# Altium PCB 30-277 - DriveHUB - CV Card DCDC Module.PcbDoc
Units mil, origin at the board's own origin, x right, y up, seen from the top; angles counter-clockwise.
Board outline 2362.2 x 1574.8 mil, 4 copper layers (Top Layer, Signal Layer 1, Signal Layer 2, Bottom Layer), stack 64.331 mil thick; 35 components, 23 nets, 143 pads, 513 vias.
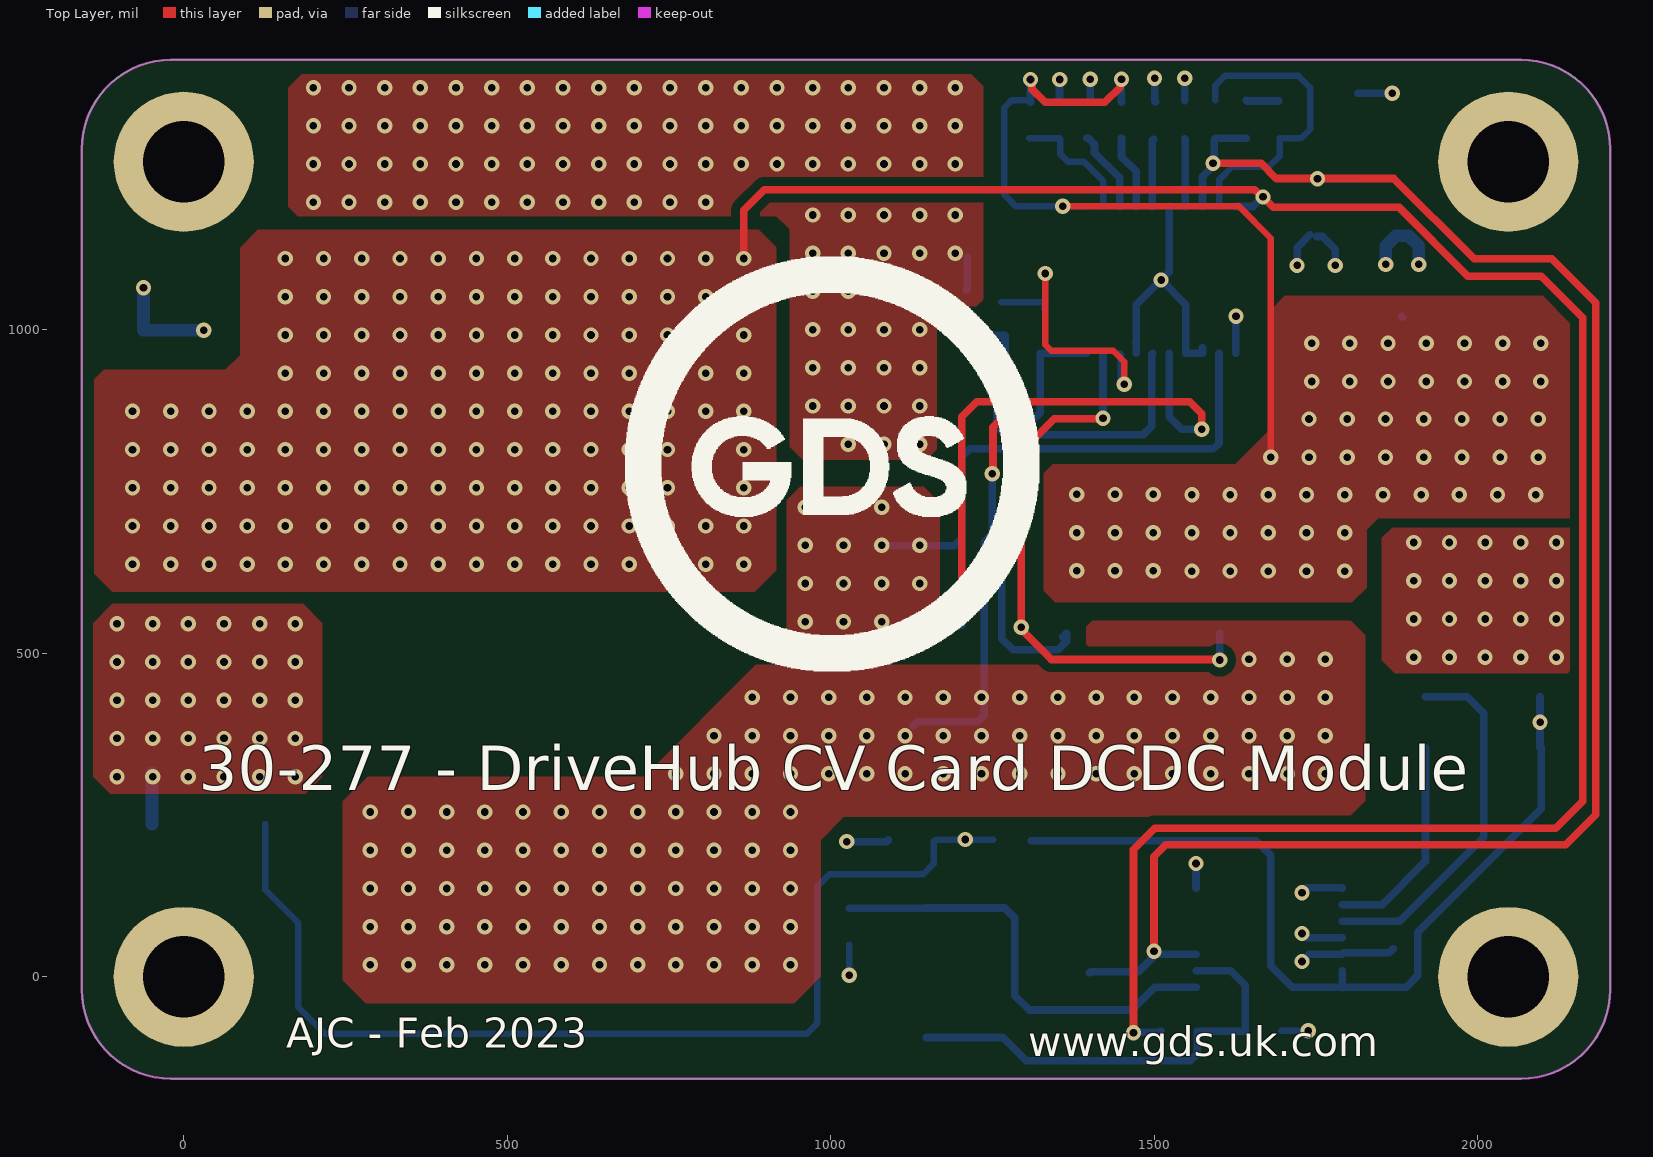
[diagram p0: Top Layer view]
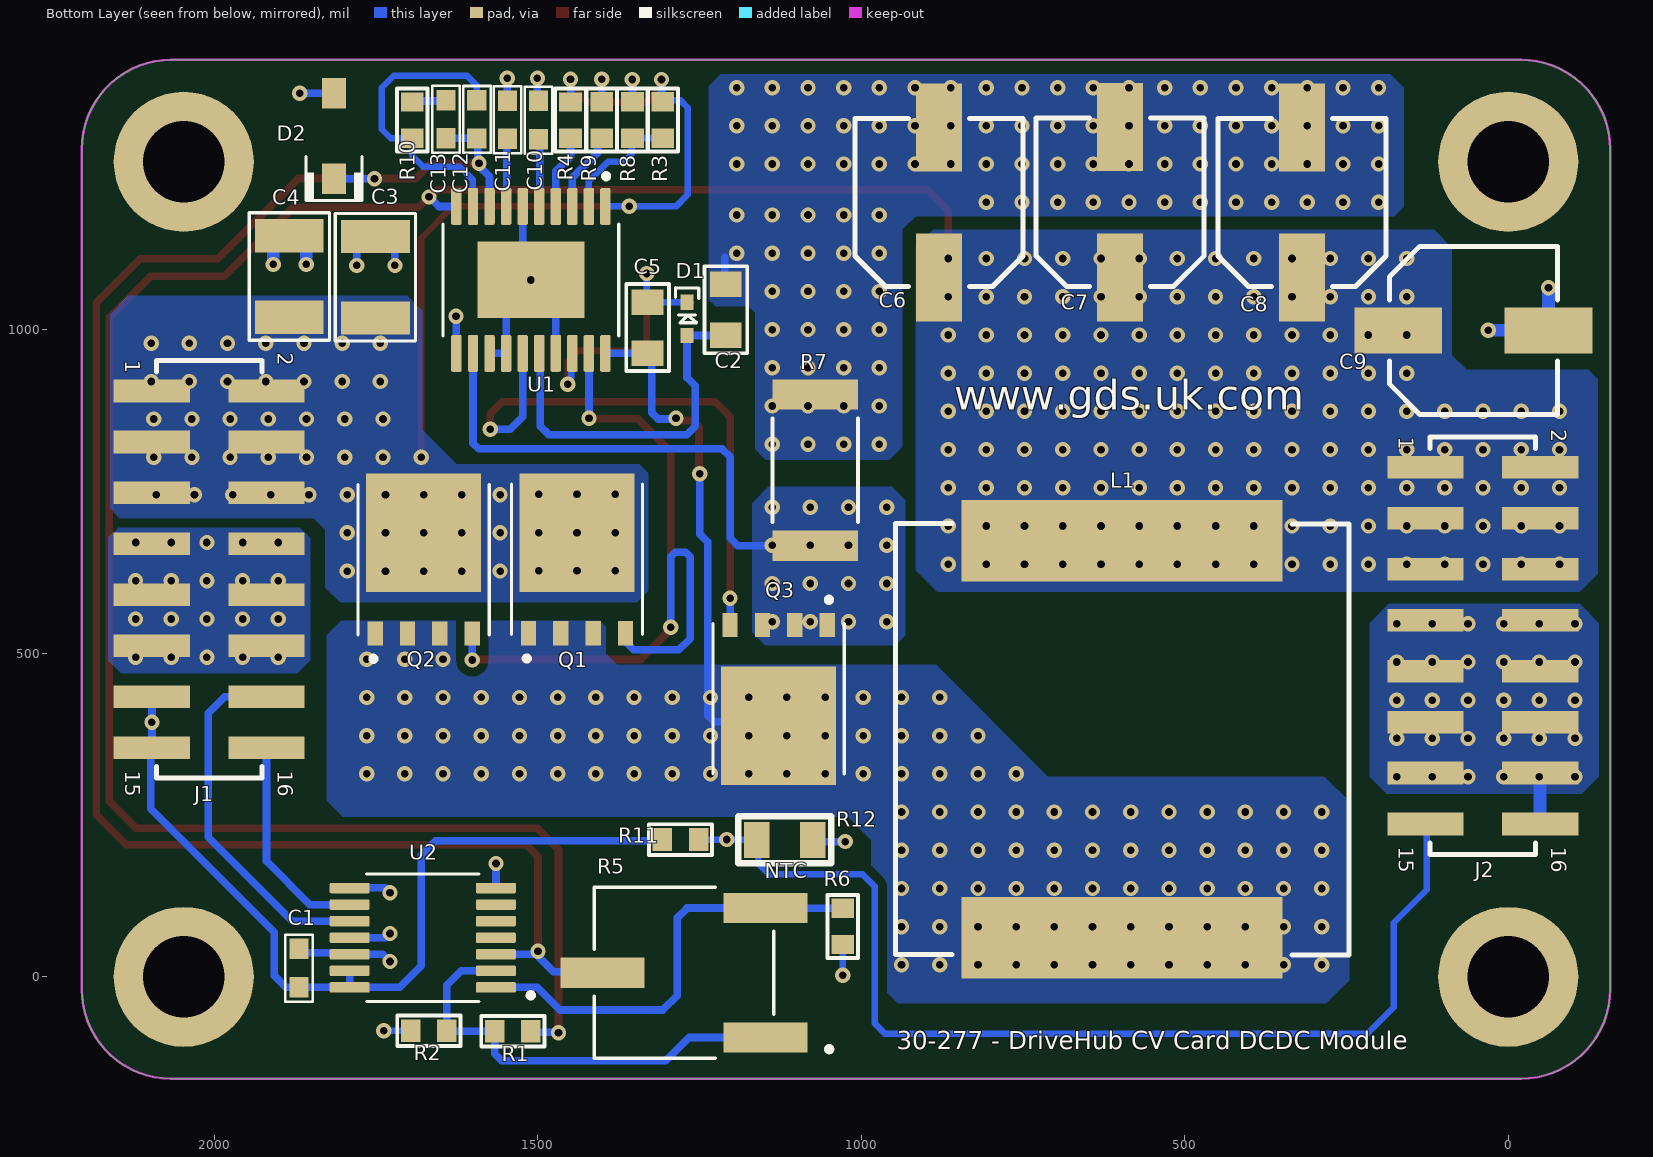
[diagram p1: Bottom Layer view, seen from below]
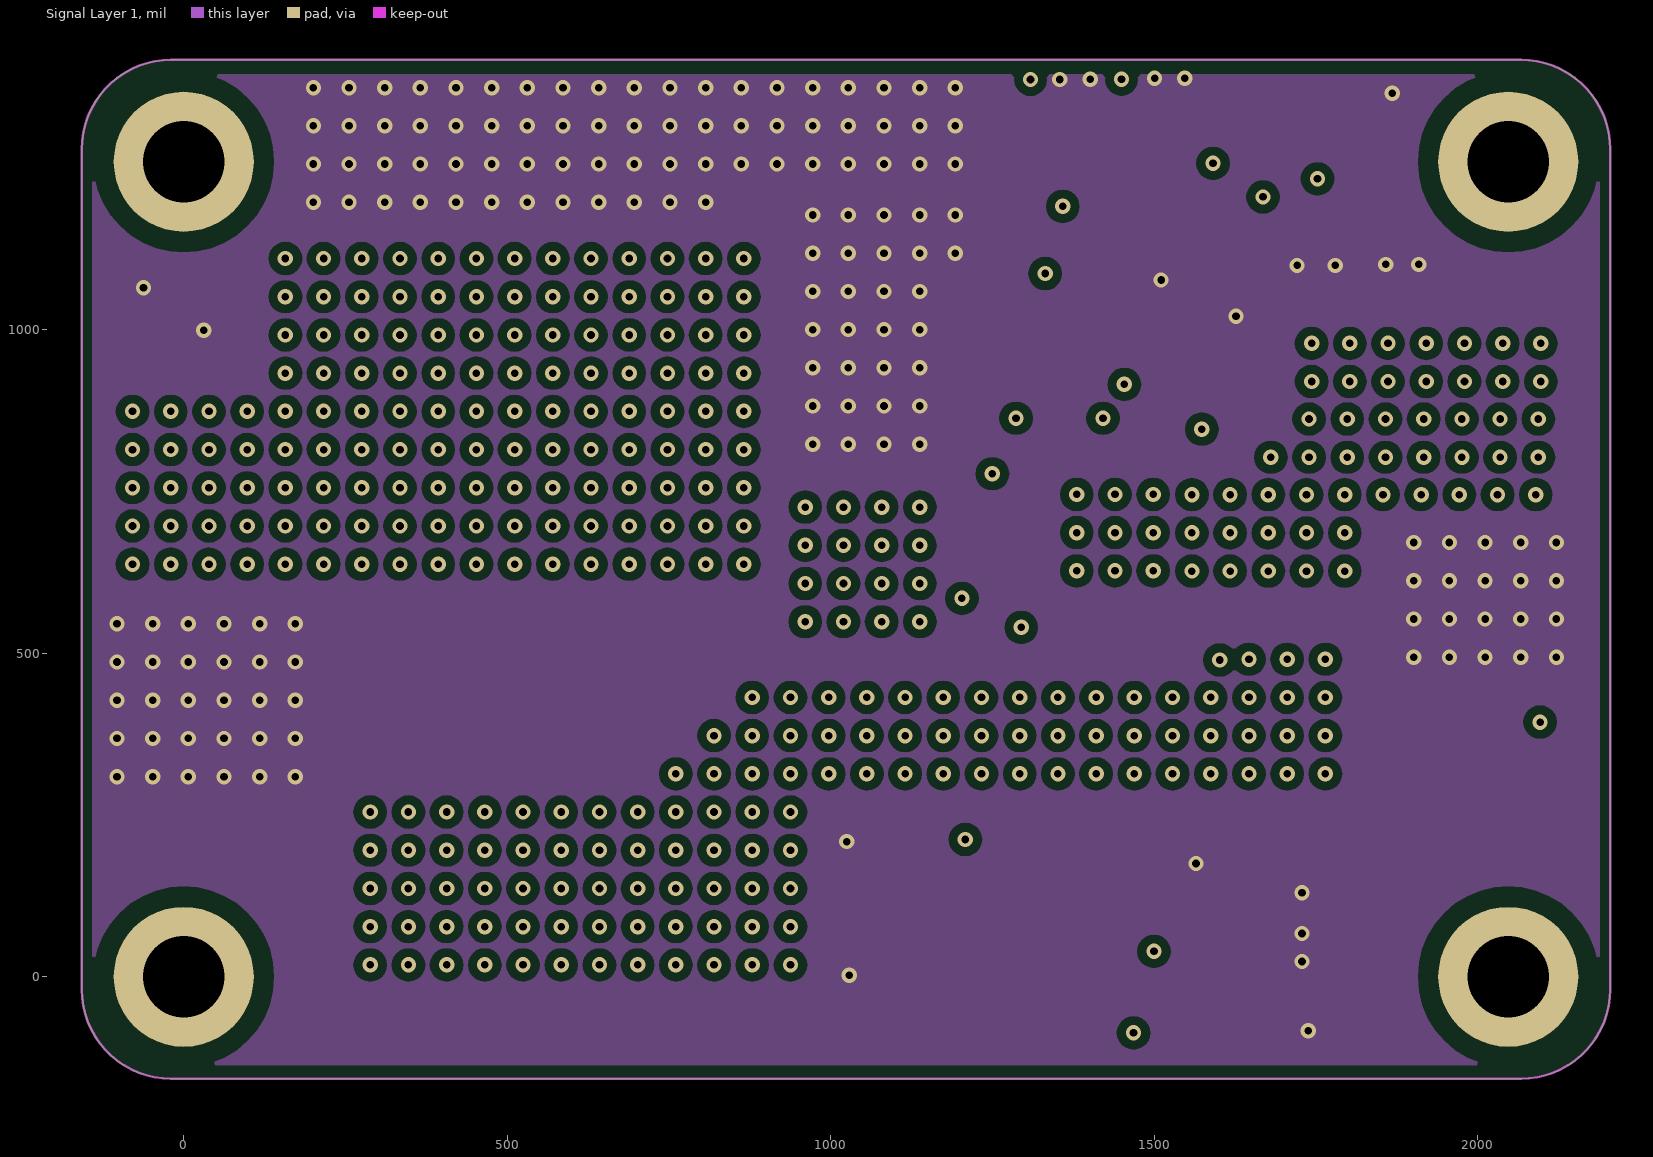
[diagram p2: Signal Layer 1]
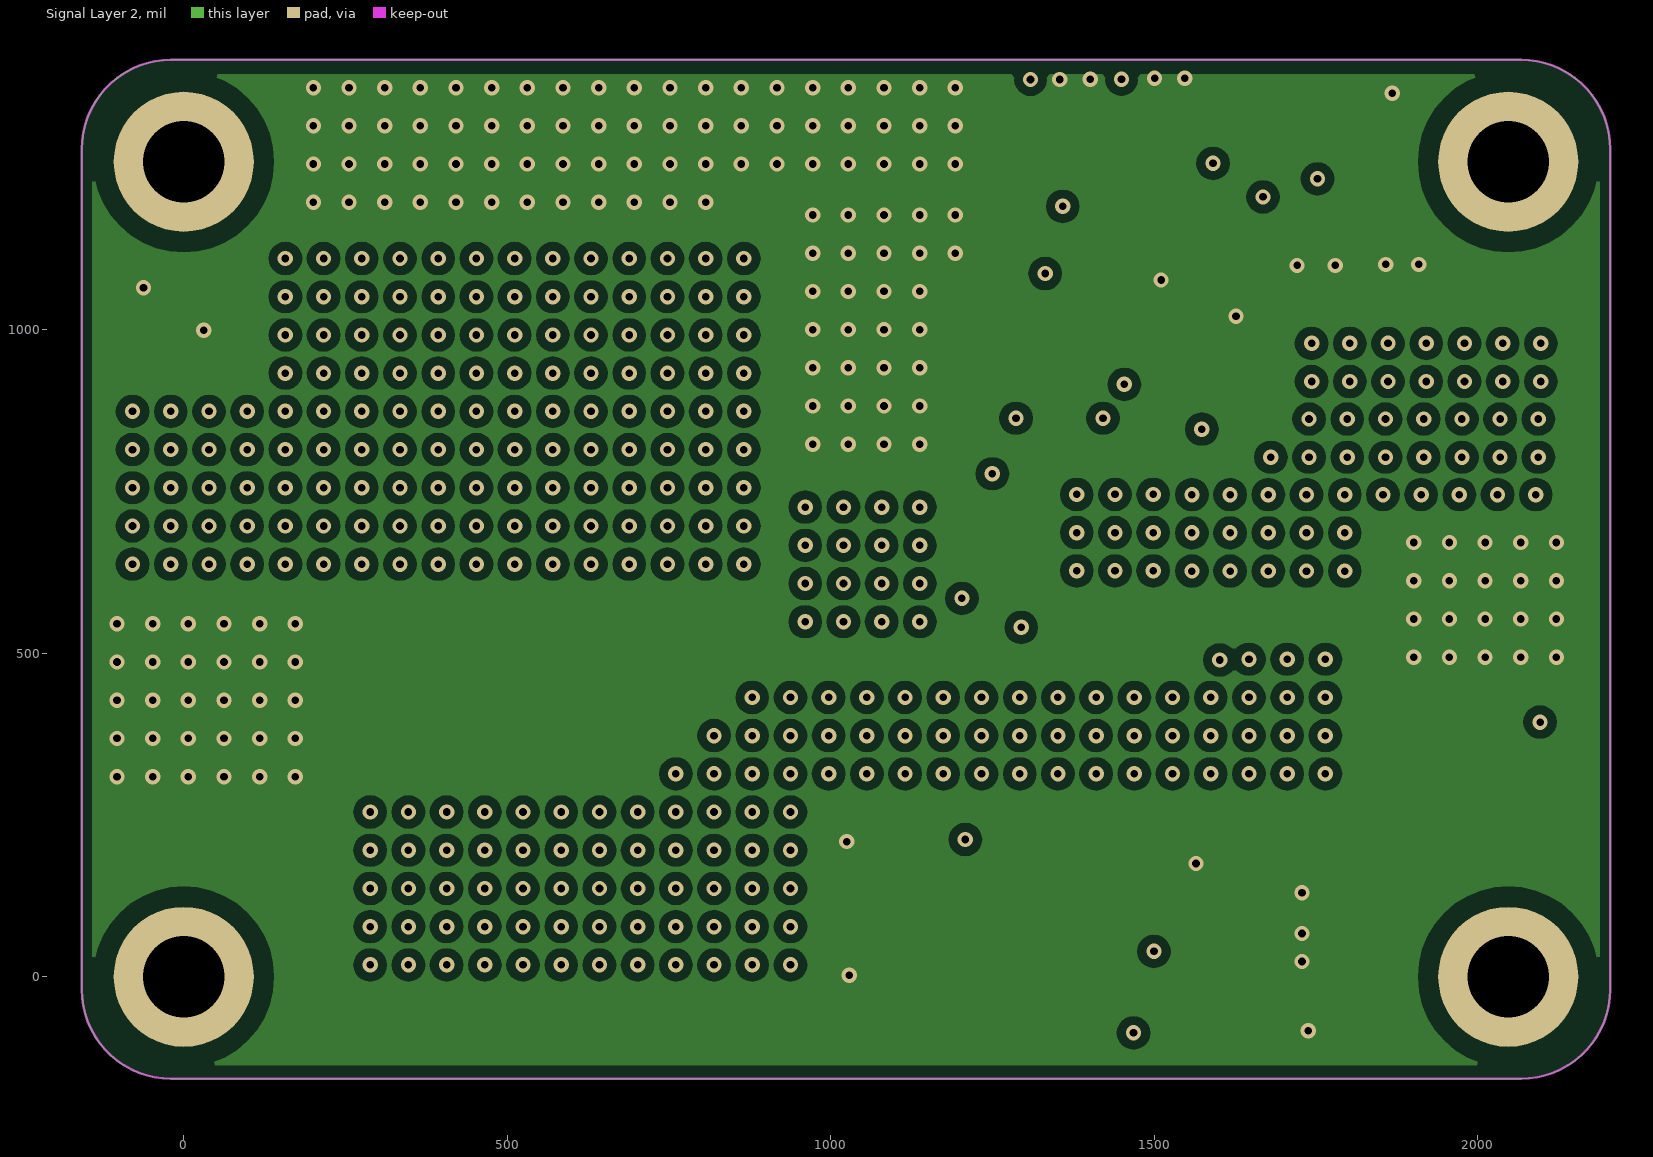
[diagram p3: Signal Layer 2]
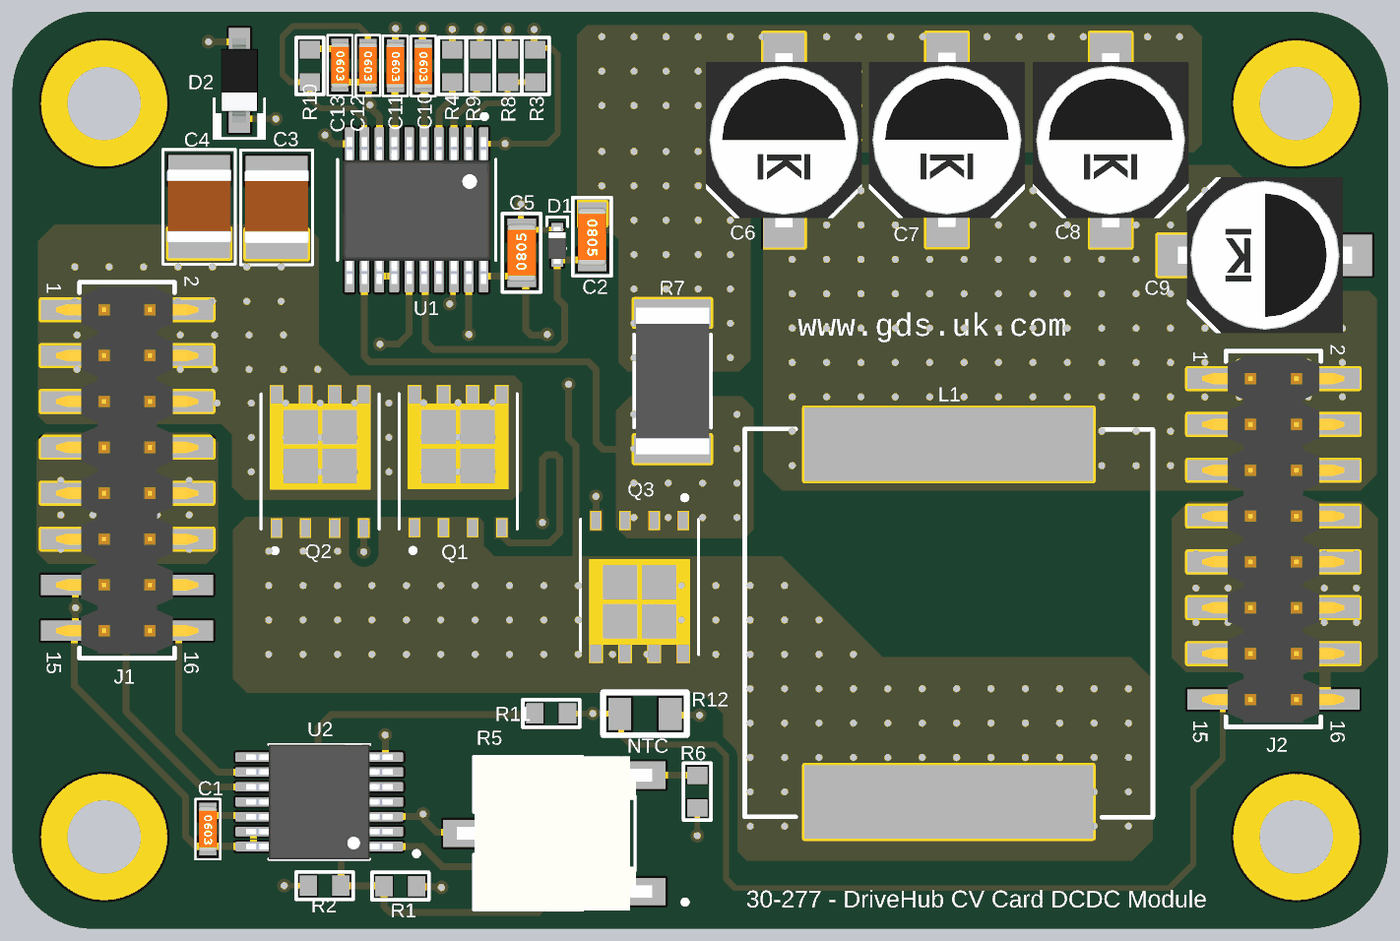
[diagram p4: 3D render of the assembled board from below, using the file's embedded part models]

## Layer stack, top to bottom
Top Solder: solder mask 0.4, Solder Resist, Dk 3.5
Top Layer: signal copper 1.4173
Dielectric 1: core 7.6772, FR-4, Dk 4.2
Signal Layer 1: signal copper 1.4173
Dielectric 3: prepreg 43.3071, Dk 4.2
Signal Layer 2: signal copper 1.4173
Dielectric 2: core 7.6772, Dk 4.2
Bottom Layer: signal copper 1.4173
Bottom Solder: solder mask 0.4, Solder Resist, Dk 3.5

## Board outline
-157.48,-19.68 -157.48,1279.53 cw(c-19.69,1279.53) -19.69,1417.32 2066.93,1417.32 cw(c2066.93,1279.53) 2204.72,1279.53 2204.72,-19.68 cw(c2066.93,-19.68) 2066.93,-157.48 -19.69,-157.48 cw(c-19.69,-19.68)

## Design rules (kind name [scope] priority, off if disabled: settings)
AssemblyTestPointUsage AssemblyTestPointUsage_1 [All] p1:
AssemblyTestpoint AssemblyTestpoint_1 [All] p1: testpointundercomponent=TRUE minsize=40 maxsize=100 preferedsize=60 minholesize=0 maxholesize=40 preferedholesize=32 testpointgrid=1 usegrid=TRUE gridtolerance=0.01 allowsidetop=TRUE allowsidebottom=TRUE
Clearance Clearance_1 [All] p1: gap=13.78 ignorepadtopadclearanceinfootprint=FALSE except(0: Arc-Hole Track-Hole SMDPad-Hole THPad-Hole Via-Hole Fill-Hole Poly-Hole Region-Hole Text-Hole; 7.87: Arc-Arc Arc-Track Arc-SMDPad Arc-THPad Arc-Via Track-Track Track-SMDPad Track-THPad Track-Via SMDPad-SMDPad SMDPad-THPad SMDPad-Via THPad-THPad THPad-Via Via-Via; 31.5: THPad-Fill THPad-Poly THPad-Region)
ComponentClearance ComponentClearance_1 [All] p1: gap=10 collisioncheckmode=3 verticalgap=10 showdistances=FALSE
DiffPairsRouting DiffPairsRouting_1 [All] p1: maxlimit=10 minlimit=10 mostfreqgap=10 toplayer_minwidth=15 toplayer_maxwidth=15 toplayer_prefwidth=15 midlayer1_minwidth=15 midlayer1_maxwidth=15 midlayer1_prefwidth=15 midlayer2_minwidth=15 midlayer2_maxwidth=15 midlayer2_prefwidth=15 bottomlayer_minwidth=15 bottomlayer_maxwidth=15 bottomlayer_prefwidth=15 substack1={602BE6B8-BCF5-42F7-80EE-9EABDBDCAD91} toplayer_{602be6b8-bcf5-42f7-80ee-9eabdbdcad91}_minwidth=15 toplayer_{602be6b8-bcf5-42f7-80ee-9eabdbdcad91}_maxwidth=15 toplayer_{602be6b8-bcf5-42f7-80ee-9eabdbdcad91}_prefwidth=15 midlayer1_{602be6b8-bcf5-42f7-80ee-9eabdbdcad91}_minwidth=15 midlayer1_{602be6b8-bcf5-42f7-80ee-9eabdbdcad91}_maxwidth=15 midlayer1_{602be6b8-bcf5-42f7-80ee-9eabdbdcad91}_prefwidth=15 midlayer2_{602be6b8-bcf5-42f7-80ee-9eabdbdcad91}_minwidth=15 midlayer2_{602be6b8-bcf5-42f7-80ee-9eabdbdcad91}_maxwidth=15 midlayer2_{602be6b8-bcf5-42f7-80ee-9eabdbdcad91}_prefwidth=15 bottomlayer_{602be6b8-bcf5-42f7-80ee-9eabdbdcad91}_minwidth=15 bottomlayer_{602be6b8-bcf5-42f7-80ee-9eabdbdcad91}_maxwidth=15 bottomlayer_{602be6b8-bcf5-42f7-80ee-9eabdbdcad91}_prefwidth=15 substack2={9FFB04B3-7FA0-4F7E-A894-CCF1FA13E5B6} toplayer_{9ffb04b3-7fa0-4f7e-a894-ccf1fa13e5b6}_minwidth=15 toplayer_{9ffb04b3-7fa0-4f7e-a894-ccf1fa13e5b6}_maxwidth=15 toplayer_{9ffb04b3-7fa0-4f7e-a894-ccf1fa13e5b6}_prefwidth=15 midlayer1_{9ffb04b3-7fa0-4f7e-a894-ccf1fa13e5b6}_minwidth=15 midlayer1_{9ffb04b3-7fa0-4f7e-a894-ccf1fa13e5b6}_maxwidth=15 midlayer1_{9ffb04b3-7fa0-4f7e-a894-ccf1fa13e5b6}_prefwidth=15 midlayer2_{9ffb04b3-7fa0-4f7e-a894-ccf1fa13e5b6}_minwidth=15 midlayer2_{9ffb04b3-7fa0-4f7e-a894-ccf1fa13e5b6}_maxwidth=15 midlayer2_{9ffb04b3-7fa0-4f7e-a894-ccf1fa13e5b6}_prefwidth=15 bottomlayer_{9ffb04b3-7fa0-4f7e-a894-ccf1fa13e5b6}_minwidth=15 bottomlayer_{9ffb04b3-7fa0-4f7e-a894-ccf1fa13e5b6}_maxwidth=15 bottomlayer_{9ffb04b3-7fa0-4f7e-a894-ccf1fa13e5b6}_prefwidth=15 substack3={916E22A2-DB7E-4412-B5DF-158B42E2E58C} toplayer_{916e22a2-db7e-4412-b5df-158b42e2e58c}_minwidth=15 toplayer_{916e22a2-db7e-4412-b5df-158b42e2e58c}_maxwidth=15 toplayer_{916e22a2-db7e-4412-b5df-158b42e2e58c}_prefwidth=15 midlayer1_{916e22a2-db7e-4412-b5df-158b42e2e58c}_minwidth=15 midlayer1_{916e22a2-db7e-4412-b5df-158b42e2e58c}_maxwidth=15 midlayer1_{916e22a2-db7e-4412-b5df-158b42e2e58c}_prefwidth=15 midlayer2_{916e22a2-db7e-4412-b5df-158b42e2e58c}_minwidth=15 midlayer2_{916e22a2-db7e-4412-b5df-158b42e2e58c}_maxwidth=15 midlayer2_{916e22a2-db7e-4412-b5df-158b42e2e58c}_prefwidth=15 bottomlayer_{916e22a2-db7e-4412-b5df-158b42e2e58c}_minwidth=15 bottomlayer_{916e22a2-db7e-4412-b5df-158b42e2e58c}_maxwidth=15 bottomlayer_{916e22a2-db7e-4412-b5df-158b42e2e58c}_prefwidth=15 maxuncoupledlength=500
FabricationTestPointUsage FabricationTestPointUsage_1 [All] p1: valid=0 allowmultiple=FALSE
FabricationTestpoint FabricationTestpoint_1 [All] p1: side=3 testpointundercomponent=TRUE minsize=40 maxsize=100 preferedsize=60 minholesize=0 maxholesize=40 preferedholesize=32 testpointgrid=1 allowsidetop=TRUE allowsidebottom=TRUE usegrid=TRUE gridtolerance=0.01
FanoutControl Fanout_BGA_1 [IsBGA] p1: bgadir=Out bgaviamode=Centered fanoutstyle=Auto fanoutdirection=Alternating viagrid=1 // Fanout_BGA (Default Rule)
FanoutControl Fanout_LCC_1 [IsLCC] p2: bgadir=Out bgaviamode=Centered fanoutstyle=Auto fanoutdirection=Alternating viagrid=1 // Fanout_LCC (Default Rule)
FanoutControl Fanout_SOIC_1 [IsSOIC] p3: bgadir=Out bgaviamode=Centered fanoutstyle=Auto fanoutdirection=Alternating viagrid=1 // Fanout_SOIC (Default Rule)
FanoutControl Fanout_Small_1 [(CompPinCount < 5)] p4: bgadir=Out bgaviamode=Centered fanoutstyle=Auto fanoutdirection=OutThenIn viagrid=1 // Fanout_Small (Default Rule)
FanoutControl Fanout_Default_1 [All] p5: bgadir=Out bgaviamode=Centered fanoutstyle=Auto fanoutdirection=Alternating viagrid=1 // Fanout_Default (Default Rule)
Height Height_1 [All] p1: minheight=0 maxheight=1000 prefheight=500
HoleSize HoleSize_1 [All] p1: absolutevalues=TRUE maxlimit=196.85 minlimit=1 maxpercent=80.000 minpercent=20.000
HoleToHoleClearance HoleToHoleClearance_1 [All] p1: gap=0 allowstackedmicrovias=TRUE
LayerPairs LayerPairs_1 [All] p1: enforce=TRUE
MinimumSolderMaskSliver MinimumSolderMaskSliver_1 [All] p1: minsoldermaskwidth=0
NetAntennae NetAntennae_1 [All] p1: netantennaetolerance=0
PasteMaskExpansion PasteMaskExpansion_1 [All] p1: expansion=0
PlaneClearance PlaneClearance_1 [All] p1: clearance=20
PlaneConnect PlaneConnect_1 [All] p1: planeconnectstyle=Relief reliefexpansion=20 reliefentries=4 reliefconductorwidth=15.75 reliefairgap=11.81
PolygonConnect PolygonConnect_1 [All] p1: thpad.connectstyle=Relief thpad.reliefconductorwidth=29.53 thpad.reliefentries=4 thpad.polygonreliefangle="90 Angle" thpad.airgapwidth=11.81 smdpad.connectstyle=Direct smdpad.reliefconductorwidth=10 smdpad.reliefentries=4 smdpad.polygonreliefangle="45 Angle" smdpad.airgapwidth=10 via.connectstyle=Direct via.reliefconductorwidth=10 via.reliefentries=4 via.polygonreliefangle="45 Angle" via.airgapwidth=10
RoutingCorners RoutingCorners_1 [All] p1: cornerstyle=45-Degree minsetback=100 maxsetback=100
RoutingLayers RoutingLayers_1 [All] p1: top layer_v5=TRUE mid layer 1_v5=TRUE mid layer 2_v5=TRUE bottom layer_v5=TRUE
RoutingPriority RoutingPriority_1 [All] p1: routingpriority=0
RoutingTopology RoutingTopology_1 [All] p1: topology=Shortest
RoutingVias RoutingVias_1 [All] p1: holewidth=11.81 width=23.62 viastyle="Through Hole" minholewidth=11.81 minwidth=23.62 maxholewidth=11.81 maxwidth=23.62
ShortCircuit ShortCircuit_1 [All] p1: allowed=FALSE
SilkToBoardRegionClearance SilkToBoardRegionClearance_1 [All] p2:
SilkToSilkClearance SilkToSilkClearance_1 [All] p1: silktosilkclearance=0
SilkToSolderMaskClearance SilkToSolderMaskClearance_1 [IsPad] p1: minsilkscreentomaskgap=0 clearancetoexposedcopper=TRUE
SolderMaskExpansion SolderMaskExpansion_1 [All] p1: expansion=4 istentingtop=FALSE
UnRoutedNet UnRoutedNet_1 [All] p1:
UnpouredPolygon UnpouredPolygon_1 [All] p1:
Width Width_1 [All] p1: maxlimit=393.7 minlimit=3.94 preferedwidth=10 substack1={602BE6B8-BCF5-42F7-80EE-9EABDBDCAD91} substack2={9FFB04B3-7FA0-4F7E-A894-CCF1FA13E5B6} substack3={916E22A2-DB7E-4412-B5DF-158B42E2E58C}
1 further rules are at their usual default settings.

## Components (designator, comment, footprint, x,y, rotation, side; value= is the part's Value field where it differs from the comment)
C1 "100nF" SMD_C(0603) 1869.13,13.58 r270 bottom
C2 "1uF" SMD_C(0805) 1209.45,1031.1 r270 bottom
C3 "2.2uF/100V" SMD_C(1210) 1750.98,1081.26 r270 bottom
C4 "2.2uF/100V" SMD_C(1210) 1884.06,1082.44 r270 bottom
C5 "1uF" SMD_C(0805) 1330.31,1003.5 r90 bottom
C6 "50V/47uF" CAPAE7866X54M 879.92,1196.85 r90 bottom
C7 "50V/47uF" CAPAE7866X54M 600,1197.24 r90 bottom
C8 "50V/47uF" CAPAE7866X54M 318.9,1196.85 r90 bottom
C9 "50V/47uF" CAPAE7866X54M 53.94,999.21 r180 bottom
C10 "1.2nF" SMD_C(0603) 1499.21,1324.41 r270 bottom
C11 "33nF" SMD_C(0603) 1547.05,1324.65 r270 bottom
C12 "100pF" SMD_C(0603) 1594.29,1325.39 r270 bottom
C13 "100pF" SMD_C(0603) 1642.1,1325.61 r270 bottom
D1 "BAS516,115" SOD523 1269.29,1016.89 r270 bottom
D2 "2V" SOD123 1814.96,1299.61 r90 bottom
J1 "62101621921" 62101621921 2007.87,629.92 r270 bottom locked
J2 "62101621921" 62101621921 39.37,511.81 r270 bottom locked
L1 "10uH" IND_PA4344.223ANLT 596.85,367.32 r90 bottom
Q1 "BSC0805LSATMA1" TDSON-8 1439.37,645.28 r90 bottom
Q2 "BSC0805LSATMA1" TDSON-8 1676.38,644.88 r90 bottom
Q3 "BSC0805LSATMA1" TDSON-8 1127.76,429.53 r270 bottom
R1 "43k" SMD_R(0603) 1538.58,-84.25 r180 bottom
R2 "3.09k" SMD_R(0603) 1668.5,-83.46 r180 bottom
R3 "100k" SMD_R(0603) 1306.69,1324.41 r90 bottom
R4 "1M" SMD_R(0603) 1449.41,1324.25 r90 bottom
R5 "100k" TRIM_3361P-1-104GLF 1274.02,6.3 r0 bottom
R6 "200k" SMD_R(0603) 1028.74,77.95 r90 bottom
R7 "1W/3m" SMD_R(2512) 1071.26,783.07 r270 bottom
R8 "3.09k" SMD_R(0603) 1353.54,1324.41 r270 bottom
R9 "10.7k" SMD_R(0603) 1401.18,1324.41 r270 bottom
R10 "255k" SMD_R(0603) 1693.9,1324.25 r90 bottom
R11 "15k" SMD_R(0603) 1279.53,212.2 r0 bottom
R12 "NTCS0805E3104SMT" SMD_R(0805) 1118.5,211.42 r180 bottom
U1 "LM5116MH/NOPB" HTSSOP-20 1510.63,1077.17 r270 bottom value=N/A
U2 "TPL0102-100PWR" SOP65P640X120-14N 1677.8,60.43 r0 bottom

## Footprints (in the part's own frame and the unit in brackets; to place one, negate y for a bottom-side part, rotate by r counter-clockwise, add the part's x,y. Pads: shape width x height; smd on the part's side, far side on the other; paste and mask are expansions set on the pad)
62101621921 [mm]
  rect 0.89x3 smd: 1(-7,-2.25) 2(-7,2.25) 3(-5,-2.25) 4(-5,2.25) 5(-3,-2.25) 6(-3,2.25) 7(-1,-2.25) 8(-1,2.25) 9(1,-2.25) 10(1,2.25) 11(3,-2.25) 12(3,2.25) 13(5,-2.25) 14(5,2.25) 15(7,-2.25) 16(7,2.25)
  silkscreen extent -8.2,-2.07 8.2,2.07, body extent -8,-3.1 8,3.1, height 6.7
CAPAE7866X54M [mm] "Aluminum Electrolytic Capacitor, Body 6.60x6.60x5.40mm, IPC Low Density"
  rect 3.45x1.8 smd: 1(-2.95,0) 2(2.95,0)
  silkscreen extent -3.3,-3.3 3.3,3.3, body extent -3.8,-3.4 3.8,3.4, height 5.63
HTSSOP-20 [mm]
  rrect25% 1.44x0.41 smd: 1(-2.885,2.925) 2(-2.885,2.275) 3(-2.885,1.625) 4(-2.885,0.975) 5(-2.885,0.325) 6(-2.885,-0.325) 7(-2.885,-0.975) 8(-2.885,-1.625) 9(-2.885,-2.275) 10(-2.885,-2.925) 11(2.885,-2.925) 12(2.885,-2.275) 13(2.885,-1.625) 14(2.885,-0.975) 15(2.885,-0.325) 16(2.885,0.325) 17(2.885,0.975) 18(2.885,1.625) 19(2.885,2.275) 20(2.885,2.925)
  rect 3x4.2 smd paste-3: 21(0,0)
  silkscreen extent -4.17,-3.45 2.2,3.45, body extent -3.18,-3.25 3.22,3.25, height 1.1
IND_PA4344.223ANLT [mm] "Wurth Inductor 1210 Package"
  rect 3.2x12.6 smd: 1(-7.8,0) 2(7.8,0)
  silkscreen extent -8.47,-8.9 8.47,8.9, body extent -8.43,-8.89 8.46,8.92, height 7
SMD_C(0603) [mm]
  rect 0.8x0.75 smd: 1(-0.75,0) 2(0.75,0)
  silkscreen extent -1.31,-0.54 1.32,0.54, body extent -1,-0.39 1,0.39, height 0.79
SMD_C(0805) [mm]
  rect 1x1.25 smd: 1(-1,0) 2(1,0)
  silkscreen extent -1.71,-0.84 1.71,0.84, body extent -1.25,-0.62 1.25,0.62, height 0.79
SMD_C(1210) [mm] "Chip Capacitor, Body 3.2x2.5mm, IPC High Density"
  rect 1.3x2.7 smd: 1(-1.6,0) 2(1.6,0)
  silkscreen extent -2.5,-1.58 2.5,1.58, body extent -1.64,-1.4 1.56,1.4, height 2.5
SMD_R(0603) [mil]
  rect 30x35 smd mask+2: 1(-28,0) 2(28,0)
  silkscreen extent -49,-24 49,24, body extent -35,-14 35,13, height 24
SMD_R(0805) [mm]
  rect 1x1.4 smd: 1(-1.1,0) 2(1.1,0)
  silkscreen extent -1.82,-0.92 1.82,0.94, body extent -1.38,-0.58 1.32,0.61, height 0.6
SMD_R(2512) [mil]
  rect 47x132 smd: 1(-117,0) 2(117,0)
  silkscreen extent -80,-66 80,66, body extent -126,-63 126,63, height 28
SOD123 [mm]
  rect 1.21x0.93 smd: A(1.68,0) C(-1.68,0)
  silkscreen extent -2.54,-1.1 -0.8,1.1, body extent -1.85,-0.8 1.85,0.8, height 1.27
SOD523 [mm]
  rect 0.6x0.5 smd: A(0.65,0) C(-0.65,0)
  silkscreen extent -1.22,-0.46 0.15,0.46, body extent -0.79,-0.41 0.81,0.39, height 0.65
SOP65P640X120-14N [mm]
  rrect25% 1.57x0.41 smd: 1(-2.87,1.95) 2(-2.87,1.3) 3(-2.87,0.65) 4(-2.87,0) 5(-2.87,-0.65) 6(-2.87,-1.3) 7(-2.87,-1.95) 8(2.87,-1.95) 9(2.87,-1.3) 10(2.87,-0.65) 11(2.87,0) 12(2.87,0.65) 13(2.87,1.3) 14(2.87,1.95)
  silkscreen extent -4.34,-2.5 2.2,2.5, body extent -3.2,-2.5 3.2,2.5, height 1.2
TDSON-8 [mm]
  rect 4.65x4.51 smd paste-3 mask+0: D(1.05,0)
  rect 0.95x0.6 smd paste-1 mask+0: G(-2.9,-1.905) S(-2.9,-0.635) S(-2.9,0.635) S(-2.9,1.905)
  silkscreen extent -3.99,-2.58 2.95,2.58
TRIM_3361P-1-104GLF [mm]
  rect 3.3x1.19 smd: 1(-3.2,2.54) 2(3.2,0) 3(-3.2,-2.54)
  silkscreen extent -5.8,-3.35 3.52,3.35, body extent -4.26,-3.35 4.27,3.36, height 5.84

## Part data
C1: library part "100nF 50V 0603 X7R", "100nF 50V 0603 X7R", Manufacturer=Yageo, Manufacturer Part Number=CC0603KRX7R9BB104, Supplier Part Number=603-CC603KRX7R9BB104, Supplier=mouser
C2 C5: library part "1uF ±10% 50V", "1uF ±10% 50V", Manufacturer=Yageo, Manufacturer Part Number=CC0805KKX5R9BB105, Supplier Part Number=603-CC0805KKX5R9BB105, Price=0.26, Supplier=mouser
C3 C4: library part C1210C225K1RACTU, "2.2 uF ± 10% 100V", Manufacturer=KEMET, Supplier Part Number=80-C1210C225K1R, Manufacturer Part Number=C1210C225K1RACTU, Price=0.96, Supplier=mouser
C6 C7 C8 C9: library part EMZR500ARA470MF61G, "Aluminium Electrolytic Capacitors - SMD 50V 47uF 2000Hrs 20% ESR=680mOhms", Manufacturer="United Chemi-Con", Supplier Part Number=661-EMZR500ARA470MF6, Manufacturer Part Number=EMZR500ARA470MF61G, Supplier=mouser
C10: library part "1.2nF ± 5% 50V", "1.2nF ± 5% 50V", Manufacturer=Yageo, Manufacturer Part Number=CC0603JRX7R9BB122, Supplier Part Number=603-CC0603JRX7R9BB122, Supplier=mouser
C11: library part "33nF ± 10% 50V", "33nF ± 10% 50V", Manufacturer=Yageo, Manufacturer Part Number=CC0603JRX7R9BB333, Supplier Part Number=603-CC0603JRX7R9BB333, Supplier=mouser
C12 C13: library part "100pF ± 5% 50V", "100pF ± 5% 50V", Manufacturer=Yageo, Manufacturer Part Number=CC0603JRNPO9BN101, Supplier Part Number=603-CC0603JRNPO9BN101, Price=0.1, Supplier=mouser
D1: "Diodes - General Purpose, Power, Switching", Manufacturer=Nexperia, Supplier Part Number=771-BAS516-T/R, Manufacturer Part Number=BAS516,115, PackageReference=BAS516,115, Supplier=mouser
D2: library part SZMMSZ4679T1G, "Zener Diodes 500MW 2V", Manufacturer=onsemi, Supplier Part Number=863-SZMMSZ4679T1G, Manufacturer Part Number=SZMMSZ4679T1G, Supplier=mouser
J1 J2: "WR-PHD Pin Header, SMT, Vertical, pitch 2mm, 2 Row, 16P", Contact Resistance=20mΩ, Manufacturer="Wurth Elektronik", Operating Temperature Max=105°C, Operating Temperature Min=-40°C, Rated Current=2A, Supplier Part Number=710-62101621921, Withstanding Voltage=500V, Working Voltage=200V, Category="Board-to-Board Connectors", ComponentLink1Description="Website Link", ComponentLink1URL=https://www.we-online.com/redexpert/article/621316245821?ad, ComponentLink2Description="Datasheet Link", ComponentLink2URL=https://www.we-online.com/redexpert/spec/621316245821?ad, Gender="Pin Header", Manufacturer Part Number=62101621921, Match Code=WR-PHD, Mount="Surface Mount", Number of Pins=16, Number of Rows=2, Orientation=Vertical, Packaging="Tape and Reel", Pitch=2mm, Supplier=mouser
L1: library part PA4344.103ANLT, "Power Inductors - SMD 10uH 21A 7mm 20% SMT", Manufacturer="Pulse Electronics", Supplier Part Number=673-PA4344.103ANLT, Manufacturer Part Number=PA4344.103ANLT, Supplier=mouser
Q1 Q2 Q3: "MOSFET 100V Vds 20V Vgs TDSON-8", Manufacturer="Infineon Technologies", Supplier Part Number=726-BSC0805LSATMA1, Manufacturer Part Number=BSC0805LSATMA1, PackageReference=BSC0805LSATMA1, Supplier=mouser
R1: library part "43 kOhms ±1% 0.1W", "43 kOhms ±1% 0.1W", Manufacturer=Yageo, Manufacturer Part Number=RC0603FR-0743KL, Supplier Part Number=603-RC0603FR-0743KL, Price=0.1, Supplier=mouser
R2 R8: library part "3.09 kOhms ±1% 0.1W", "3.09 kOhms ±1% 0.1W", Manufacturer=Yageo, Manufacturer Part Number=RC0603FR-073K09L, Supplier Part Number=603-RC0603FR-073K09L, Price=0.1, Supplier=mouser
R3: library part "100 kOhms ±1% 0.1W", "100 kOhms ±1% 0.1W", Manufacturer=Yageo, Manufacturer Part Number=RC0603FR-07100KL, Supplier Part Number=603-RC0603FR-07100KL, Price=0.1, Supplier=mouser
R4: library part "1 MOhms ±1% 0.1W", "1 MOhms ±1% 0.1W", Manufacturer=Yageo, Manufacturer Part Number=RC0603FR-071ML, Supplier Part Number=603-RC0603FR-071ML, Price=0.1, Supplier=mouser
R5: library part 3361P-1-104GLF, "100 kOhms 0.5W, 1/2W Gull Wing Surface Mount Trimmer Potentiometer Cermet 1.0 Turn Top Adjustment", Manufacturer=Bourns, Package="3361P Bourns", Supplier Part Number=652-3361P-1-104GLF, Availability="In Stock", Check_prices=https://www.snapeda.com/parts/3361P-1-104GLF/Bourns/view-part/?ref=eda, Manufacturer Part Number=3361P-1-104GLF, Price=None, Purchase-URL=https://pricing.snapeda.com/search/part/3361P-1-104GLF/?ref=eda, SnapEDA_Link=https://www.snapeda.com/parts/3361P-1-104GLF/Bourns/view-part/?ref=snap, Supplier=mouser
R6: library part "200 kOhms ±1% 0.1W", "200 kOhms ±1% 0.1W", Manufacturer=Yageo, Manufacturer Part Number=RC0603FR-07200KL, Supplier Part Number=603-RC0603FR-07200KL, Price=0.1, Supplier=mouser
R7: library part PA2512FKF070R003E, "3 mOhms ±1% 1W", Manufacturer=Yageo, Supplier Part Number=603-PA2512FKF070R003, Manufacturer Part Number=PA2512FKF070R003E, Supplier=mouser
R9: library part "10.7 kOhms ±1% 0.1W", "10.7 kOhms ±1% 0.1W", Manufacturer=Yageo, Manufacturer Part Number=RC0603FR-0710K7L, Supplier Part Number=603-RC0603FR-0710K7L, Price=0.1, Supplier=mouser
R10: library part "255 kOhms ±1% 0.1W", "255 kOhms ±1% 0.1W", Manufacturer=Yageo, Manufacturer Part Number=RC0603FR-07255KL, Supplier Part Number=603-RC0603FR-07255KL, Price=0.1, Supplier=mouser
R11: library part "15 kOhms ±1% 0.1W", "15 kOhms ±1% 0.1W", Manufacturer=Yageo, Manufacturer Part Number=RC0603FR-0715KL, Supplier Part Number=603-RC0603FR-0715KL, Price=0.1, Supplier=mouser
R12: "THERM NTC 100KOHM 3590K 0805", Manufacturer="Vishay Beyschlag/Draloric/BC Components", Supplier Part Number=594-NTCS0805E3104SMT, Manufacturer Part Number=NTCS0805E3104SMT, Price=1.16, Supplier=mouser
U1: Manufacturer Name="Texas Instruments", Supplier Part Number=926-LM5116MH/NOPB, Manufacturer Part Number=LM5116MH/NOPB, PackageReference=LM5116MH/NOPB, Supplier=mouser
U2: library part TPL0102-100RUCR, "Non Volatile Digital Potentiometer, 100 kohm, Dual, I2C, Linear, ± 20%, 2.7 V", Manufacturer="Texas Instruments", Supplier Part Number=595-TPL0102-100PWR, Manufacturer Part Number=TPL0102-100PWR, Price=3, Supplier=Mouser

## Free pads (board coordinates)
  round 216.54 hole 125.98: 0(0,0) 0(0,1259.84) 0(2047.24,0) 0(2047.24,1259.84)

## Via types
v1: diameter 23.62, hole 11.81, Top Layer to Bottom Layer, tented both sides, 513 vias

## Nets (pads, with @x,y where several pads share a name; then routed paths per layer and width w, separated by ;. In a path a pad name is that pad's centre, name@x,y a point inside that pad or via, vN(x,y) a via of type N, cw(c..) or ccw(c..) an arc to the next point about the centre after c; other vN are vias at no path point)
+3V3: C1.2 J1.13 J1.15 R11.2 U2.13 U2.14 | length 1333.8
  Bottom Layer w12: R11.2@1310.19,210.24 1657.87,210.24 1680.31,187.8 1680.31,17.32 1713.58,-15.94 1790.79,-15.94 U2.13 ; U2.14 1791.18,-15.94 1829.76,-15.94 C1.2 1889.57,-15.94 1907.48,1.97 1907.48,68.9 2098.43,259.84 J1.15@2098.43,354.33 ; J1.15 v1(2096.46,393.7) J1.13
+VIN: C3.2 C4.2 J1.1 J1.2 J1.3 J1.4 J1.5 J1.6 Q1.D Q2.D R3.2 R4.2 U1.1 | length 1249.5
  Top Layer w10: v1(1358.66,1190.95) 1359.05,1191.34 1630.71,1191.34 1680.31,1141.73 v1(1680.31,803.15)
  Top Layer w11.81: v1(1308.86,1387.01) 1311.12,1384.75 1311.12,1371.95 1331.5,1351.57 1423.62,1351.57 1447.22,1375.18 1447.22,1385.02 v1(1449.48,1387.28)
  Bottom Layer w10: R3.2 1303.85,1355.25 1280.05,1355.25 1268.11,1343.31 1268.11,1209.06 1286.42,1190.75 1358.46,1190.75 v1(1358.66,1190.95) ; v1@1358.66,1190.75 U1.1
  Bottom Layer w11.81: R3.2@1308.86,1352.25 v1(1308.86,1387.01) ; v1@1449.21,1387.01 1449.21,1385.83 1449.21,1352.45 R4.2 ; C4.2@1882.87,1020.63 C4.2
  other v1: 1558.27,627.17 1617.32,627.17 1676.38,627.17 1735.43,627.17 1794.49,627.17 1380.31,627.56 1439.37,627.56 1498.43,627.56 1558.27,686.22 1617.32,686.22 1676.38,686.22 1735.43,686.22 1794.49,686.22 1380.31,686.61 1439.37,686.61 1498.43,686.61 1558.27,745.28 1617.32,745.28 1676.38,745.28 1735.43,745.28 1794.49,745.28 1853.54,745.28 1912.6,745.28 1971.65,745.28 2030.71,745.28 2089.76,745.28 1380.31,745.67 1439.37,745.67 1498.43,745.67 1739.37,803.15 1798.43,803.15 1857.48,803.15 1916.54,803.15 1975.59,803.15 2034.65,803.15 2093.7,803.15 1739.37,862.2 1798.43,862.2 1857.48,862.2 1916.54,862.2 1975.59,862.2 2034.65,862.2 2093.7,862.2 1743.31,920.08 1802.36,920.08 1861.42,920.08 1920.47,920.08 1979.53,920.08 2038.58,920.08 2097.64,920.08 1743.31,979.13 1802.36,979.13 1861.42,979.13 1920.47,979.13 1979.53,979.13 2038.58,979.13 2097.64,979.13
+Vout: C6.1 C7.1 C8.1 C9.1 J2.1 J2.2 J2.3 J2.4 J2.5 J2.6 L1.2 R1.2 U1.10 | length 3314.6
  Top Layer w11.81: v1(865.75,1110.24) 865.75,1185.04 897.24,1216.54 1655.29,1216.54 1664.05,1207.77 1665.85,1207.77 v1(1668.11,1205.51) 1684.25,1189.37 1878.35,1189.37 1984.65,1083.07 2098.43,1083.07 2162.6,1018.9 2162.6,271.65 2120.47,229.53 1500.79,229.53 1468.11,196.85 v1(1468.11,-86.61)
  Bottom Layer w11.81: v1(1468.11,-86.61) 1469.29,-85.43 1509.4,-85.43 R1.2 ; U1.10 1653.35,1190.75 v1(1668.11,1205.51)
  other v1: -79.13,637.8 -20.08,637.8 38.98,637.8 98.03,637.8 157.09,637.8 216.14,637.8 275.2,637.8 334.25,637.8 393.31,637.8 452.36,637.8 511.42,637.8 570.47,637.8 629.53,637.8 688.58,637.8 747.64,637.8 806.69,637.8 865.75,637.8 -79.13,696.85 -20.08,696.85 38.98,696.85 98.03,696.85 157.09,696.85 216.14,696.85 275.2,696.85 334.25,696.85 393.31,696.85 452.36,696.85 511.42,696.85 570.47,696.85 629.53,696.85 688.58,696.85 747.64,696.85 806.69,696.85 865.75,696.85 -79.13,755.91 -20.08,755.91 38.98,755.91 98.03,755.91 157.09,755.91 216.14,755.91 275.2,755.91 334.25,755.91 393.31,755.91 452.36,755.91 511.42,755.91 570.47,755.91 629.53,755.91 688.58,755.91 747.64,755.91 806.69,755.91 865.75,755.91 -79.13,814.96 -20.08,814.96 38.98,814.96 98.03,814.96 157.09,814.96 216.14,814.96 275.2,814.96 334.25,814.96 393.31,814.96 452.36,814.96 511.42,814.96 570.47,814.96 629.53,814.96 688.58,814.96 747.64,814.96 806.69,814.96 865.75,814.96 -79.13,874.02 -20.08,874.02 38.98,874.02 98.03,874.02 157.09,874.02 216.14,874.02 275.2,874.02 334.25,874.02 393.31,874.02 452.36,874.02 511.42,874.02 570.47,874.02 629.53,874.02 688.58,874.02 747.64,874.02 806.69,874.02 865.75,874.02 157.09,933.07 216.14,933.07 275.2,933.07 334.25,933.07 393.31,933.07 452.36,933.07 511.42,933.07 570.47,933.07 629.53,933.07 688.58,933.07 747.64,933.07 806.69,933.07 865.75,933.07 157.09,992.13 216.14,992.13 275.2,992.13 334.25,992.13 393.31,992.13 452.36,992.13 511.42,992.13 570.47,992.13 629.53,992.13 688.58,992.13 747.64,992.13 806.69,992.13 865.75,992.13 157.09,1051.18 216.14,1051.18 275.2,1051.18 334.25,1051.18 393.31,1051.18 452.36,1051.18 511.42,1051.18 570.47,1051.18 629.53,1051.18 688.58,1051.18 747.64,1051.18 806.69,1051.18 865.75,1051.18 157.09,1110.24 216.14,1110.24 275.2,1110.24 334.25,1110.24 393.31,1110.24 452.36,1110.24 511.42,1110.24 570.47,1110.24 629.53,1110.24 688.58,1110.24 747.64,1110.24 806.69,1110.24
DCDC_TEMP: J2.15 R11.1 R12.1 | length 1660.7
  Bottom Layer w10: J2.15@125.98,236.22 125.98,134.65 177.17,83.46 177.17,-46.85 218.11,-87.8 963.39,-87.8 979.13,-72.05 979.13,139.76 998.03,158.66 1142.91,158.66 1158.97,174.72 1158.97,208.57 R12.1 ; R12.1@1164.57,212.2 v1(1208.05,212.2) R11.1
GND: C1.1 C2.1 C3.1 C4.1 C6.2 C7.2 C8.2 C9.2 C10.1 C11.1 D2.A J1.7 J1.8 J1.9 J1.10 J1.11 J1.12 J2.7 J2.8 J2.9 J2.10 J2.11 J2.12 J2.13 J2.14 J2.16 R2.1 R6.1 R7.1 R8.1 R9.1 R12.2 U1.6 U1.11 U1.13 U1.14 U1.17 U1.21 U2.7 U2.8 U2.11 U2.12 | length 1673.4
  Bottom Layer w10: v1(1028.74,2.36) R6.1 ; R2.1 v1(1738.19,-83.46)
  Bottom Layer w11.81: v1(1024.8,209.06) 1086.61,209.06 R12.2@1088.98,211.42 ; C2.1@1209.45,1061.42 1211.02,1062.99 1211.02,1111.81 ; R8.1@1353,1351.87 R8.1 v1@1353.54,1386.61 ; R9.1 v1(1401.18,1387.4) ; U1.17 1472.24,979.69 1471.65,980.28 1472.24,980.87 1472.24,1038.78 v1(1510.63,1077.17) ; v1(1500.59,1388.98) 1500.59,1353.74 C10.1@1501.97,1352.36 ; U1.6 1523.43,1089.96 v1(1510.63,1077.17) ; C11.1 v1(1547.05,1388.98) ; v1(1564.57,175.2) 1564.57,137.47 U2.7 ; U1.13 1574.61,971.81 1574.02,972.4 1574.02,965.16 1573.52,964.67 1572.44,963.58 U1.14 1549.02,1038.78 v1(1510.63,1077.17) ; U1.11 1626.08,963.88 1626.08,1020.93 v1(1626.38,1021.22) ; v1(1720.87,1099.61) 1720.87,1127.17 C3.1@1740.55,1146.85 ; v1(1728.35,23.62) 1739.57,34.84 U2.12 1792.95,37.01 1863.03,37.01 C1.1 C1.1@1869.53,43.5 ; v1(1728.35,66.93) 1734.84,60.43 U2.11 ; v1(1728.35,129.92) 1736.22,137.8 1790.2,137.8 U2.8 ; C3.1 1760.24,1144.25 1779.92,1124.57 v1(1779.92,1099.61) ; D2.A v1(1868.11,1365.75)
  Bottom Layer w19.68: v1(-62.2,1064.96) C9.2 v1(30.71,999.21) ; J2.16 J2.14 ; v1(1857.87,1101.18) 1857.87,1129.68 1873.62,1145.43 C4.1 1893.31,1145.43 1909.05,1129.68 v1(1909.05,1101.18)
  other v1: -103.15,309.45 -48.03,309.45 7.09,309.45 62.2,309.45 117.32,309.45 172.44,309.45 -103.15,368.5 -48.03,368.5 7.09,368.5 62.2,368.5 117.32,368.5 172.44,368.5 -103.15,427.56 -48.03,427.56 7.09,427.56 62.2,427.56 117.32,427.56 172.44,427.56 -103.15,486.61 -48.03,486.61 7.09,486.61 62.2,486.61 117.32,486.61 172.44,486.61 1901.18,494.09 1956.3,494.09 2011.42,494.09 2066.54,494.09 2121.65,494.09 -103.15,545.67 -48.03,545.67 7.09,545.67 62.2,545.67 117.32,545.67 172.44,545.67 1901.18,553.15 1956.3,553.15 2011.42,553.15 2066.54,553.15 2121.65,553.15 1901.18,612.2 1956.3,612.2 2011.42,612.2 2066.54,612.2 2121.65,612.2 1901.18,671.26 1956.3,671.26 2011.42,671.26 2066.54,671.26 2121.65,671.26 972.05,823.23 1027.17,823.23 1082.28,823.23 1137.4,823.23 972.05,882.28 1027.17,882.28 1082.28,882.28 1137.4,882.28 972.05,941.34 1027.17,941.34 1082.28,941.34 1137.4,941.34 972.05,1000.39 1027.17,1000.39 1082.28,1000.39 1137.4,1000.39 972.05,1059.45 1027.17,1059.45 1082.28,1059.45 1137.4,1059.45 972.05,1118.5 1027.17,1118.5 1082.28,1118.5 1137.4,1118.5 1192.52,1118.5 972.05,1177.56 1027.17,1177.56 1082.28,1177.56 1137.4,1177.56 1192.52,1177.56 200.39,1197.24 255.51,1197.24 310.63,1197.24 365.75,1197.24 420.87,1197.24 475.98,1197.24 531.1,1197.24 586.22,1197.24 641.34,1197.24 696.46,1197.24 751.57,1197.24 806.69,1197.24 200.39,1256.3 255.51,1256.3 310.63,1256.3 365.75,1256.3 420.87,1256.3 475.98,1256.3 531.1,1256.3 586.22,1256.3 641.34,1256.3 696.46,1256.3 751.57,1256.3 806.69,1256.3 861.81,1256.3 916.93,1256.3 972.05,1256.3 1027.17,1256.3 1082.28,1256.3 1137.4,1256.3 1192.52,1256.3 200.39,1315.35 255.51,1315.35 310.63,1315.35 365.75,1315.35 420.87,1315.35 475.98,1315.35 531.1,1315.35 586.22,1315.35 641.34,1315.35 696.46,1315.35 751.57,1315.35 806.69,1315.35 861.81,1315.35 916.93,1315.35 972.05,1315.35 1027.17,1315.35 1082.28,1315.35 1137.4,1315.35 1192.52,1315.35 200.39,1374.41 255.51,1374.41 310.63,1374.41 365.75,1374.41 420.87,1374.41 475.98,1374.41 531.1,1374.41 586.22,1374.41 641.34,1374.41 696.46,1374.41 751.57,1374.41 806.69,1374.41 861.81,1374.41 916.93,1374.41 972.05,1374.41 1027.17,1374.41 1082.28,1374.41 1137.4,1374.41 1192.52,1374.41 1353.81,1386.88
I2C_CLK: J1.14 U2.10 | length 564.9
  Bottom Layer w11.81: U2.10 1879.72,86.02 2009.45,215.75 2009.45,407.48 1983.86,433.07 J1.14
I2C_DAT: J1.16 U2.9 | length 331.9
  Bottom Layer w11.81: U2.9 1852.17,111.61 1919.29,178.74 J1.16
NetC2_2: C2.2 D1.A U1.16 | length 569
  Bottom Layer w11.81: C2.2 1209.88,991.3 D1.A 1269.29,925.98 1256.69,913.39 1256.69,851.18 1270.08,837.8 1482.68,837.8 1496.06,851.18 1496.06,961.81 U1.16
NetC5_1: C5.1 L1.1 Q1.S Q2.S Q3.D U1.20 | length 812.6
  Top Layer w11.81: v1(1249.8,777.56) 1250.79,778.54 1250.79,849.61 1261.13,859.94 1283.01,859.94 v1(1286.45,863.39)
  Bottom Layer w11.81: Q3.D 1133.83,394.26 1227.33,394.26 1237.4,404.33 1237.4,672.05 1249.8,684.45 v1(1249.8,777.56) ; v1(1286.45,863.39) 1287.63,862.2 1313.78,862.2 1323.62,872.05 C5.1@1323.62,962.95 ; C5.1@1324.02,963.58 U1.20
  other v1: 288.19,18.5 347.24,18.5 406.3,18.5 465.35,18.5 524.41,18.5 583.46,18.5 642.52,18.5 701.57,18.5 760.63,18.5 819.68,18.5 878.74,18.5 937.8,18.5 288.19,77.56 347.24,77.56 406.3,77.56 465.35,77.56 524.41,77.56 583.46,77.56 642.52,77.56 701.57,77.56 760.63,77.56 819.68,77.56 878.74,77.56 937.8,77.56 288.19,136.61 347.24,136.61 406.3,136.61 465.35,136.61 524.41,136.61 583.46,136.61 642.52,136.61 701.57,136.61 760.63,136.61 819.68,136.61 878.74,136.61 937.8,136.61 288.19,195.67 347.24,195.67 406.3,195.67 465.35,195.67 524.41,195.67 583.46,195.67 642.52,195.67 701.57,195.67 760.63,195.67 819.68,195.67 878.74,195.67 937.8,195.67 288.19,254.72 347.24,254.72 406.3,254.72 465.35,254.72 524.41,254.72 583.46,254.72 642.52,254.72 701.57,254.72 760.63,254.72 819.68,254.72 878.74,254.72 937.8,254.72 760.63,313.78 819.68,313.78 878.74,313.78 937.8,313.78 996.85,313.78 1055.91,313.78 1114.96,313.78 1174.02,313.78 1233.07,313.78 1292.13,313.78 1351.18,313.78 1410.24,313.78 1469.29,313.78 1528.35,313.78 1587.4,313.78 1646.46,313.78 1705.51,313.78 1764.57,313.78 819.68,372.83 878.74,372.83 937.8,372.83 996.85,372.83 1055.91,372.83 1114.96,372.83 1174.02,372.83 1233.07,372.83 1292.13,372.83 1351.18,372.83 1410.24,372.83 1469.29,372.83 1528.35,372.83 1587.4,372.83 1646.46,372.83 1705.51,372.83 1764.57,372.83 878.74,431.89 937.8,431.89 996.85,431.89 1055.91,431.89 1114.96,431.89 1174.02,431.89 1233.07,431.89 1292.13,431.89 1351.18,431.89 1410.24,431.89 1469.29,431.89 1528.35,431.89 1587.4,431.89 1646.46,431.89 1705.51,431.89 1764.57,431.89 1646.46,490.94 1705.51,490.94 1764.57,490.94
NetC5_2: C5.2 D1.C U1.18 | length 441.3
  Top Layer w10: v1(1331.5,1087.01) 1331.5,977.17 1340.94,967.72 1436.61,967.72 1453.84,950.49 v1(1453.84,915.75)
  Bottom Layer w10: D1.C@1263.39,1042.87 C5.2 1331.5,1044.05 v1(1331.5,1087.01) ; C5.2@1330.02,1033.33 1330.31,1033.03 C5.2@1330.71,1032.64 ; U1.18 1447.94,962.3 1447.94,925.34 1453.84,919.43 v1(1453.84,915.75)
NetC10_2: C10.2 U1.5 | length 104.9
  Bottom Layer w11.81: U1.5@1497.24,1190.75 1497.24,1292.91 C10.2
NetC11_2: C11.2 U1.7 | length 104.8
  Bottom Layer w11.81: C11.2 1548.03,1294.13 U1.7@1548.03,1190.75
NetC12_1: C12.1 R10.1 U1.9 | length 478.8
  Bottom Layer w10: C12.1 1594.29,1377.76 1609.45,1392.91 1722.83,1392.91 1741.34,1374.41 1741.34,1310.24 1727.35,1296.25 R10.1 1693.9,1268.7 1677.17,1251.97 1620.47,1251.97 1600.2,1231.69 U1.9
NetC13_1: C13.1 R10.2 | length 51
  Bottom Layer w11.81: C13.1 1643.54,1353.69 R10.2@1692.46,1353.69
NetQ1_G: Q1.G Q2.G U1.19 | length 1288.9
  Top Layer w11.81: v1(1420.87,863.39) 1420.08,862.6 1345.67,862.6 1294.49,811.42 v1(1294.49,540.16) 1294.49,537.01 1340.95,490.55 1600.59,490.55 v1(1601.38,489.76)
  Bottom Layer w11.81: v1(1294.49,540.16) 1294.49,649.38 1287.57,656.3 1271.49,656.3 1264.57,649.38 1264.57,522.83 1281.89,505.51 1351.55,505.51 1364.37,518.34 Q1.G@1364.37,525.2 ; Q1.G@1358.46,525.2 Q1.G ; v1(1420.87,863.39) 1420.96,863.48 1420.96,963.48 U1.19 ; v1(1601.38,489.76) Q2.G
NetQ3_G: Q3.G U1.15 | length 890.4
  Top Layer w11.81: v1(1202.76,585.04) 1202.76,865.75 1225.98,888.98 1555.12,888.98 1573.62,870.47 v1(1573.62,846.46)
  Bottom Layer w11.81: Q3.G v1(1202.76,585.04) ; U1.15 1523.43,865.55 1542.52,846.46 v1(1573.62,846.46)
NetQ3_S: Q3.S R7.2 U1.12 | length 806.9
  Bottom Layer w11.81: R7.2 1190.87,666.07 1202.76,677.95 1202.76,803.54 1215.35,816.14 1591.34,816.14 1600.2,825 U1.12
  other v1: 960.63,548.82 1019.68,548.82 1078.74,548.82 1137.8,548.82 960.63,607.87 1019.68,607.87 1078.74,607.87 1137.8,607.87 960.63,666.93 1019.68,666.93 1078.74,666.93 1137.8,666.93 960.63,725.98 1019.68,725.98 1078.74,725.98 1137.8,725.98
NetR1_1: R1.1 R2.2 R5.1 U2.2 | length 702.1
  Bottom Layer w11.81: R5.1 1266.14,-93.7 1301.97,-129.53 1555.91,-129.53 1566.58,-118.85 R1.1 1566.98,-83.86 1640.11,-83.86 R2.2 1640.5,-12.94 1618.31,9.25 U2.2
NetR3_1: R3.1 R8.2 U1.2 | length 194.9
  Bottom Layer w10: R3.1 R8.2 1354.5,1295.45 1354.5,1272.27 1366.93,1259.84 1391.34,1259.84 1421.26,1229.92 U1.2@1421.26,1190.75
NetR4_1: R4.1 U1.4 | length 115
  Bottom Layer w11.81: R4.1 1449.41,1267.91 1472.24,1245.08 U1.4
NetR5_3: R5.3 R6.2 U2.1 | length 686.2
  Bottom Layer w11.81: R6.2 1147.69,105.95 R5.3 1269.29,106.3 1284.65,90.94 1284.65,-29.13 1306.69,-51.18 1465.75,-51.18 1500.59,-16.34 U2.1
NetR9_2: R9.2 U1.3 | length 127.7
  Bottom Layer w11.81: R9.2@1396.06,1296.02 1398.56,1296.02 1407.66,1286.92 1407.66,1273.84 1446.65,1234.84 U1.3
Vout_FB: C12.2 C13.2 D2.C R5.2 U1.8 U2.3 | length 2740.6
  Top Layer w11.81: v1(1499.61,39.37) 1499.61,185.83 1517.72,203.94 2135.83,203.94 2182.68,250.79 2182.68,1041.73 2114.57,1109.84 1994.49,1109.84 1870.47,1233.86 1752.36,1233.86 1744.09,1233.86 1743.31,1234.65 1742.52,1233.86 1688.98,1233.86 1665.45,1257.39 v1(1590.98,1257.39)
  Bottom Layer w11.81: R5.2 1401.74,8.04 1475.76,8.04 1497.35,29.63 1497.35,37.11 v1(1499.61,39.37) 1504.13,34.84 U2.3 ; U1.8 1574.61,1236.91 1590.98,1253.29 v1(1590.98,1257.39) ; v1@1592.86,1253.74 1592.64,1253.97 1592.64,1294.2 C12.2 1594.51,1296.08 C13.2 ; v1(1752.36,1233.46) D2.C
pads on no net: U2.4 U2.5 U2.6

## Polygon pours and split planes (outlines as drawn)
GND on Bottom Layer "Mechanical 3-No Net" (solid, pour order 22): 1164.17,1026.39 1174.4,1036.61 1225.2,1036.61 1235.43,1046.85 1235.43,1376.77 1217.32,1394.88 182.28,1394.88 161.42,1374.02 161.42,1190.55 175.98,1175.98 916.14,1175.98 936.62,1155.51 936.61,819.29 956.69,799.21 1148.03,799.21 1164.17,815.35
GND on Bottom Layer "Mechanical 3-No Net" (solid, pour order 26): -140.16,546.85 -110.63,576.38 184.65,576.38 214.18,546.85 214.17,309.05 187.79,282.68 -113.78,282.68 -140.16,309.05
GND on Bottom Layer "Mechanical 3-No Net" (solid, pour order 25): 1851.97,678.35 1868.11,694.49 2147.64,694.49 2163.79,678.34 2163.78,489.37 2143.7,469.29 1871.65,469.29 1851.97,488.98
NetC5_1 on Bottom Layer "NETC5_1_L04_P020" (solid, pour order 20): 884.25,482.28 711.42,309.45 284.25,309.45 246.06,271.26 246.06,-5.51 281.5,-40.95 943.31,-40.94 984.65,0.39 984.65,211.42 1020.47,247.24 1801.18,247.24 1825.98,272.05 1825.98,528.35 1803.94,550.39 1404.33,550.39 1394.88,540.95 1394.88,500 1377.17,482.28
+Vout on Bottom Layer "+VOUT_L04_P023" (solid, pour order 23): 882.28,594.88 -110.24,594.88 -138.58,623.23 -138.58,923.62 -124.02,938.19 64.17,938.19 87.01,961.02 87.01,1127.17 114.57,1154.72 888.97,1154.72 915.75,1127.95 915.75,628.35
NetQ3_S on Bottom Layer "Mechanical 3-No Net" (solid, pour order 2): 932.28,736.61 953.15,757.48 1143.7,757.48 1168.9,732.28 1168.9,532.88 1148.48,512.47 947.77,512.47 932.28,527.95
+VIN on Bottom Layer "+VIN_L04_P019" (solid, pour order 19): 1701.97,1052.36 2132.68,1052.36 2161.02,1024.02 2161.02,723.62 2146.46,709.05 1846.06,709.05 1828.35,691.34 1828.35,601.57 1805.51,578.74 1346.85,578.74 1329.13,596.46 1329.13,778.35 1343.31,792.52 1625.59,792.52 1678.35,845.28 1678.35,1028.74
GND on Top Layer "Mechanical 3-No Net" (solid, pour order 34): 1164.17,1026.39 1174.4,1036.61 1225.2,1036.61 1235.43,1046.85 1235.43,1376.77 1217.32,1394.88 182.28,1394.88 161.42,1374.02 161.42,1190.55 175.98,1175.98 916.14,1175.98 936.62,1155.51 936.61,819.29 956.69,799.21 1148.03,799.21 1164.17,815.35
GND on Top Layer "Mechanical 3-No Net" (solid, pour order 33): -140.16,546.85 -110.63,576.38 184.65,576.38 214.18,546.85 214.17,309.05 187.79,282.68 -113.78,282.68 -140.16,309.05
+Vout on Top Layer "+VOUT_L01_P032" (solid, pour order 32): 882.28,594.88 -110.24,594.88 -138.58,623.23 -138.58,923.62 -124.02,938.19 64.17,938.19 87.01,961.02 87.01,1127.17 114.57,1154.72 888.97,1154.72 915.75,1127.95 915.75,628.35
NetQ3_S on Top Layer "Mechanical 3-No Net" (solid, pour order 31): 932.28,736.61 953.15,757.48 1143.7,757.48 1168.9,732.28 1168.9,532.88 1148.48,512.47 947.77,512.47 932.28,527.95
NetC5_1 on Top Layer "NETC5_1_L01_P030" (solid, pour order 30): 884.25,482.28 711.42,309.45 284.25,309.45 246.06,271.26 246.06,-5.51 281.5,-40.95 943.31,-40.94 984.65,0.39 984.65,211.42 1020.47,247.24 1801.18,247.24 1825.98,272.05 1825.98,528.35 1803.94,550.39 1404.33,550.39 1394.88,540.95 1394.88,500 1377.17,482.28
GND on Top Layer "Mechanical 3-No Net" (solid, pour order 29): 1851.97,678.35 1868.11,694.49 2147.64,694.49 2163.79,678.34 2163.78,489.37 2143.7,469.29 1871.65,469.29 1851.97,488.98
+VIN on Top Layer "+VIN_L01_P028" (solid, pour order 28): 1701.97,1052.36 2132.68,1052.36 2161.02,1024.02 2161.02,723.62 2146.46,709.05 1846.06,709.05 1828.35,691.34 1828.35,601.57 1805.51,578.74 1346.85,578.74 1329.13,596.46 1329.13,778.35 1343.31,792.52 1625.59,792.52 1678.35,845.28 1678.35,1028.74
GND on Signal Layer 2 "GND_L02_P017" (solid, pour order 24): 2040.16,-136.61 2205.11,28.34 2204.72,1255.81 2065.65,1394.89 -40.65,1394.88 -154.82,1280.71 -154.82,-42.12 -60.33,-136.61
GND on Signal Layer 1 "GND_L02_P017" (solid, pour order 17): 2040.16,-136.61 2205.11,28.34 2204.72,1255.81 2065.65,1394.89 -40.65,1394.88 -154.82,1280.71 -154.82,-42.12 -60.33,-136.61

## Keep-outs
Keep-Out Layer:
  lines w3.94: 2204.72,-19.68 cw(c2066.93,-19.68) 2066.93,-157.48 -19.69,-157.48 cw(c-19.69,-19.68) -157.48,-19.68 -157.48,1279.53 cw(c-19.69,1279.53) -19.69,1417.32 2066.93,1417.32 cw(c2066.93,1279.53) 2204.72,1279.53 ; 2204.72,-19.68 2204.72,1279.53 ; 2204.72,-19.68 2204.72,-19.68 ; 2204.72,1279.53 2204.72,1279.53

## Silkscreen, mask and mechanical layers (free items; w line width, h text height)
Top Overlay:
  drawing of 4 lines, arcs and shapes, not listed
  text "30-277 - DriveHub CV Card DCDC Module" at 22.83,265.35 h118.11
  text "AJC - Feb 2023" at 158.27,-125.2 h78.74
  text "www.gds.uk.com" at 1305.12,-138.58 h78.74
Bottom Overlay:
  text "www.gds.uk.com" at 856.3,861.02 h78.74
  text "NTC" at 1149.21,144.88 h39.37
  text "30-277 - DriveHub CV Card DCDC Module" at 944.88,-120.87 h47.24
Outline:
  the board outline again, w10

## Text inside footprints (layer, text, board x,y; h text height)
J1: Bottom Overlay "16" at 1909.45,318.9 h40 r90; Bottom Overlay "1" at 2145.67,952.76 h40 r90; Bottom Overlay "2" at 1909.45,964.57 h40 r90; Bottom Overlay "15" at 2145.67,318.9 h40 r90
J2: Bottom Overlay "16" at -59.06,200.79 h40 r90; Bottom Overlay "1" at 177.17,834.65 h40 r90; Bottom Overlay "2" at -59.06,846.46 h40 r90; Bottom Overlay "15" at 177.17,200.79 h40 r90